# EAGLE board silense (EAGLE 9.5.1), part 1 of 4

Size 160 x 100 mm. Coordinates in mm from the lower left corner, seen from the top.
Outline: 0,0 160,0 160,100 0,100 0,0
Copper layers (1*16): Top 0.035mm / dielectric 0.15mm / Bottom 0.035mm
Design rules "default": minimum track width 6mil, minimum drill 0.35mm, track to track 6mil, track to pad 6mil, pad to pad 6mil, via to via 6mil, smd to smd 6mil, copper to edge 40mil, drill to drill 6mil, minimum pad ring 10mil, minimum via ring 8mil, stop-mask expansion 4mil, vias tented up to drill 0mil, thermal gap 10mil
Net classes: 1 power_cw: width 0.2 mm; 2 power: width 0.3 mm

## Footprints (pad centres in the part's own frame; a part is rotated, then mirrored left to right if it is on the bottom)
POWERDI-123 = smd 0.9 x 1.4: A -1.6,0 | smd 2.2 x 1.4: C 0.95,0
R141426 = drill 1.295: 1 0,0; 2 5.08,5.08; 3 -5.08,5.08; 4 -5.08,-5.08; 5 5.08,-5.08
FMC-LPC-MALE = smd 0.635 x 0.635 bottom: C1 -3.175,-24.765; C2 -3.175,-23.495; C3 -3.175,-22.225; C4 -3.175,-20.955; C5 -3.175,-19.685; C6 -3.175,-18.415; C7 -3.175,-17.145; C8 -3.175,-15.875; C9 -3.175,-14.605; C10 -3.175,-13.335; C11 -3.175,-12.065; C12 -3.175,-10.795; C13 -3.175,-9.525; C14 -3.175,-8.255; C15 -3.175,-6.985; C16 -3.175,-5.715; C17 -3.175,-4.445; C18 -3.175,-3.175; C19 -3.175,-1.905; C20 -3.175,-0.635; C21 -3.175,0.635; C22 -3.175,1.905; C23 -3.175,3.175; C24 -3.175,4.445; C25 -3.175,5.715; C26 -3.175,6.985; C27 -3.175,8.255; C28 -3.175,9.525; C29 -3.175,10.795; C30 -3.175,12.065; C31 -3.175,13.335; C32 -3.175,14.605; C33 -3.175,15.875; C34 -3.175,17.145; C35 -3.175,18.415; C36 -3.175,19.685; C37 -3.175,20.955; C38 -3.175,22.225; C39 -3.175,23.495; C40 -3.175,24.765; D1 -1.905,-24.765; D2 -1.905,-23.495; D3 -1.905,-22.225; D4 -1.905,-20.955; D5 -1.905,-19.685; D6 -1.905,-18.415; D7 -1.905,-17.145; D8 -1.905,-15.875; D9 -1.905,-14.605; D10 -1.905,-13.335; D11 -1.905,-12.065; D12 -1.905,-10.795; D13 -1.905,-9.525; D14 -1.905,-8.255; D15 -1.905,-6.985; D16 -1.905,-5.715; D17 -1.905,-4.445; D18 -1.905,-3.175; D19 -1.905,-1.905; D20 -1.905,-0.635; D21 -1.905,0.635; D22 -1.905,1.905; D23 -1.905,3.175; D24 -1.905,4.445; D25 -1.905,5.715; D26 -1.905,6.985; D27 -1.905,8.255; D28 -1.905,9.525; D29 -1.905,10.795; D30 -1.905,12.065; D31 -1.905,13.335; D32 -1.905,14.605; D33 -1.905,15.875; D34 -1.905,17.145; D35 -1.905,18.415; D36 -1.905,19.685; D37 -1.905,20.955; D38 -1.905,22.225; D39 -1.905,23.495; D40 -1.905,24.765; G1 1.905,-24.765; G2 1.905,-23.495; G3 1.905,-22.225; G4 1.905,-20.955; G5 1.905,-19.685; G6 1.905,-18.415; G7 1.905,-17.145; G8 1.905,-15.875; G9 1.905,-14.605; G10 1.905,-13.335; G11 1.905,-12.065; G12 1.905,-10.795; G13 1.905,-9.525; G14 1.905,-8.255; G15 1.905,-6.985; G16 1.905,-5.715; G17 1.905,-4.445; G18 1.905,-3.175; G19 1.905,-1.905; G20 1.905,-0.635; G21 1.905,0.635; G22 1.905,1.905; G23 1.905,3.175; G24 1.905,4.445; G25 1.905,5.715; G26 1.905,6.985; G27 1.905,8.255; G28 1.905,9.525; G29 1.905,10.795; G30 1.905,12.065; G31 1.905,13.335; G32 1.905,14.605; G33 1.905,15.875; G34 1.905,17.145; G35 1.905,18.415; G36 1.905,19.685; G37 1.905,20.955; G38 1.905,22.225; G39 1.905,23.495; G40 1.905,24.765; H1 3.175,-24.765; H2 3.175,-23.495; H3 3.175,-22.225; H4 3.175,-20.955; H5 3.175,-19.685; H6 3.175,-18.415; H7 3.175,-17.145; H8 3.175,-15.875; H9 3.175,-14.605; H10 3.175,-13.335; H11 3.175,-12.065; H12 3.175,-10.795; H13 3.175,-9.525; H14 3.175,-8.255; H15 3.175,-6.985; H16 3.175,-5.715; H17 3.175,-4.445; H18 3.175,-3.175; H19 3.175,-1.905; H20 3.175,-0.635; H21 3.175,0.635; H22 3.175,1.905; H23 3.175,3.175; H24 3.175,4.445; H25 3.175,5.715; H26 3.175,6.985; H27 3.175,8.255; H28 3.175,9.525; H29 3.175,10.795; H30 3.175,12.065; H31 3.175,13.335; H32 3.175,14.605; H33 3.175,15.875; H34 3.175,17.145; H35 3.175,18.415; H36 3.175,19.685; H37 3.175,20.955; H38 3.175,22.225; H39 3.175,23.495; H40 3.175,24.765 | drill 2.692 pad 4.445: M1 2.007,31.496; M2 2.007,-31.496 | hole 1.321: 0,-27.191; 3.048,27.191
3,17/1,3 = drill 1.321 pad 3.175 octagon: 1 0,0
43045-0809 = smd 1.27 x 2.92: P$1 4.5,5.47; P$2 1.5,5.47; P$3 -1.5,5.47; P$4 -4.5,5.47; P$5 4.5,10.1; P$6 1.5,10.1; P$7 -1.5,10.1; P$8 -4.5,10.1 | smd 3.43 x 1.65: TAB1 -8.38,0; TAB2 8.38,0
BTB_CONN_68_F = smd 1.1 x 0.8: 1 -2.75,20.955; 2 -2.75,19.685; 3 -2.75,18.415; 4 -2.75,17.145; 5 -2.75,15.875; 6 -2.75,14.605; 7 -2.75,13.335; 8 -2.75,12.065; 9 -2.75,10.795; 10 -2.75,9.525; 11 -2.75,8.255; 12 -2.75,6.985; 13 -2.75,5.715; 14 -2.75,4.445; 15 -2.75,3.175; 16 -2.75,1.905; 17 -2.75,0.635; 18 -2.75,-0.635; 19 -2.75,-1.905; 20 -2.75,-3.175; 21 -2.75,-4.445; 22 -2.75,-5.715; 23 -2.75,-6.985; 24 -2.75,-8.255; 25 -2.75,-9.525; 26 -2.75,-10.795; 27 -2.75,-12.065; 28 -2.75,-13.335; 29 -2.75,-14.605; 30 -2.75,-15.875; 31 -2.75,-17.145; 32 -2.75,-18.415; 33 -2.75,-19.685; 34 -2.75,-20.955; 35 2.75,20.955; 36 2.75,19.685; 37 2.75,18.415; 38 2.75,17.145; 39 2.75,15.875; 40 2.75,14.605; 41 2.75,13.335; 42 2.75,12.065; 43 2.75,10.795; 44 2.75,9.525; 45 2.75,8.255; 46 2.75,6.985; 47 2.75,5.715; 48 2.75,4.445; 49 2.75,3.175; 50 2.75,1.905; 51 2.75,0.635; 52 2.75,-0.635; 53 2.75,-1.905; 54 2.75,-3.175; 55 2.75,-4.445; 56 2.75,-5.715; 57 2.75,-6.985; 58 2.75,-8.255; 59 2.75,-9.525; 60 2.75,-10.795; 61 2.75,-12.065; 62 2.75,-13.335; 63 2.75,-14.605; 64 2.75,-15.875; 65 2.75,-17.145; 66 2.75,-18.415; 67 2.75,-19.685; 68 2.75,-20.955 | smd 2.5 x 1.2: P$1 -2.55,23.465; P$2 2.55,23.465; P$3 -2.55,-23.465; P$4 2.55,-23.465 | hole 1.6: 0,23.165; 0,-23.165
C0805 = smd 1.3 x 1.5: 1 -0.95,0; 2 0.95,0
TP380X203 = smd 3.8 x 2.03: 1 0,0
KEYSTONE_5015 = smd 3.43 x 1.78: 1 0,0
R0805 = smd 1.3 x 1.5: 1 -0.95,0; 2 0.95,0
TFLGA-56LD = smd 0.4 x 0.2: AGND 3.7,-1.575; CK 3.7,2.925; CW 3.7,2.475; DGND 3.7,1.575; DVDD 3.7,2.025; HVM@1 -3.7,1.125; HVM@2 -3.7,0.675; HVM@3 -3.7,0.225; HVM@4 -3.7,-0.225; HVM@5 -3.7,-0.675; HVM_CW -3.7,-1.125; HVP@1 3.7,0.675; HVP@2 3.7,0.225; HVP@3 3.7,-0.225; HVP@4 3.7,-0.675; HVP@5 3.7,-1.125; HVP_CW 3.7,1.125; THSD 3.7,-2.925; VDDM 3.7,-2.025; VDDP 3.7,-2.475; XDCR_1 -3.7,2.925; XDCR_2 -3.7,2.475; XDCR_3 -3.7,2.025; XDCR_4 -3.7,1.575; XDCR_5 -3.7,-1.575; XDCR_6 -3.7,-2.025; XDCR_7 -3.7,-2.475; XDCR_8 -3.7,-2.925 | smd 0.2 x 0.4: GND_PWR@1 -2.925,-3.7; GND_PWR@2 -0.675,-3.7; GND_PWR@3 -0.675,3.7; GND_PWR@4 -2.925,3.7; IN1_0 2.925,3.7; IN1_1 2.475,3.7; IN2_0 2.025,3.7; IN2_1 1.575,3.7; IN3_0 1.125,3.7; IN3_1 0.675,3.7; IN4_0 0.225,3.7; IN4_1 -0.225,3.7; IN5_0 -0.225,-3.7; IN5_1 0.225,-3.7; IN6_0 0.675,-3.7; IN6_1 1.125,-3.7; IN7_0 1.575,-3.7; IN7_1 2.025,-3.7; IN8_0 2.475,-3.7; IN8_1 2.925,-3.7; LVOUT_1 -1.125,3.7; LVOUT_2 -1.575,3.7; LVOUT_3 -2.025,3.7; LVOUT_4 -2.475,3.7; LVOUT_5 -2.475,-3.7; LVOUT_6 -2.025,-3.7; LVOUT_7 -1.575,-3.7; LVOUT_8 -1.125,-3.7 | smd 3.5 x 3.5: SUB 0,0
CAPC3216X180N = smd 1.15 x 1.8: 1 -1.5,0; 2 1.5,0
CAPC6050X550N = smd 2.39 x 5.51: 1 -2.26,0; 2 2.26,0
CAPC3416X90N = smd 1.13 x 1.78: 1 -1.44,0; 2 1.44,0
C1206 = smd 1.6 x 1.8: 1 -1.4,0; 2 1.4,0
DIOM7958X256N = smd 2 x 3.05: 1 -3.6,0; 2 3.6,0
DIOM7959X262N = smd 2.2 x 3.15: 1 -3.5,0; 2 3.5,0
SOP65P640X120-21N = smd 1.45 x 0.45: 1 -2.925,2.925; 2 -2.925,2.275; 3 -2.925,1.625; 4 -2.925,0.975; 5 -2.925,0.325; 6 -2.925,-0.325; 7 -2.925,-0.975; 8 -2.925,-1.625; 9 -2.925,-2.275; 10 -2.925,-2.925; 11 2.925,-2.925; 12 2.925,-2.275; 13 2.925,-1.625; 14 2.925,-0.975; 15 2.925,-0.325; 16 2.925,0.325; 17 2.925,0.975; 18 2.925,1.625; 19 2.925,2.275; 20 2.925,2.925 | smd 2.74 x 3.86: 21 0,0
WE-TPC_282892 = smd 3.2 x 1: 1 0,1.1; 2 0,-1.1
WE-LHMI_402048 = smd 1.5 x 2.4: 1 -1.85,0; 2 1.85,0
M1206 = smd 1.6 x 2: 1 -1.4,0; 2 1.4,0
R1206 = smd 1.6 x 1.803: 1 -1.422,0; 2 1.422,0
QFN32 = smd 0.6 x 0.3: 1 -2.3,1.75; 2 -2.3,1.25; 3 -2.3,0.75; 4 -2.3,0.25; 5 -2.3,-0.25; 6 -2.3,-0.75; 7 -2.3,-1.25; 8 -2.3,-1.75; 17 2.3,-1.75; 18 2.3,-1.25; 19 2.3,-0.75; 20 2.3,-0.25; 21 2.3,0.25; 22 2.3,0.75; 23 2.3,1.25; 24 2.3,1.75 | smd 0.3 x 0.6: 9 -1.75,-2.3; 10 -1.25,-2.3; 11 -0.75,-2.3; 12 -0.25,-2.3; 13 0.25,-2.3; 14 0.75,-2.3; 15 1.25,-2.3; 16 1.75,-2.3; 25 1.75,2.3; 26 1.25,2.3; 27 0.75,2.3; 28 0.25,2.3; 29 -0.25,2.3; 30 -0.75,2.3; 31 -1.25,2.3; 32 -1.75,2.3 | smd 3.2 x 3.2: EXP 0,0
C0402 = smd 0.7 x 0.9: 1 -0.65,0; 2 0.65,0
C1210 = smd 1.6 x 2.7: 1 -1.4,0; 2 1.4,0
R0402 = smd 0.6 x 0.7: 1 -0.5,0; 2 0.5,0
WCAP-CSGP_0402 = smd 0.5 x 0.5: 1 -0.5,0; 2 0.5,0
SOT95P260X110-3N = smd 1.3 x 0.6: 1 -1.1,0.95; 2 -1.1,-0.95; 3 1.1,0
QFN50P900X900X100-65N = smd 0.85 x 0.3: 1 -4.45,3.75; 2 -4.45,3.25; 3 -4.45,2.75; 4 -4.45,2.25; 5 -4.45,1.75; 6 -4.45,1.25; 7 -4.45,0.75; 8 -4.45,0.25; 9 -4.45,-0.25; 10 -4.45,-0.75; 11 -4.45,-1.25; 12 -4.45,-1.75; 13 -4.45,-2.25; 14 -4.45,-2.75; 15 -4.45,-3.25; 16 -4.45,-3.75; 33 4.45,-3.75; 34 4.45,-3.25; 35 4.45,-2.75; 36 4.45,-2.25; 37 4.45,-1.75; 38 4.45,-1.25; 39 4.45,-0.75; 40 4.45,-0.25; 41 4.45,0.25; 42 4.45,0.75; 43 4.45,1.25; 44 4.45,1.75; 45 4.45,2.25; 46 4.45,2.75; 47 4.45,3.25; 48 4.45,3.75 | smd 0.3 x 0.85: 17 -3.75,-4.45; 18 -3.25,-4.45; 19 -2.75,-4.45; 20 -2.25,-4.45; 21 -1.75,-4.45; 22 -1.25,-4.45; 23 -0.75,-4.45; 24 -0.25,-4.45; 25 0.25,-4.45; 26 0.75,-4.45; 27 1.25,-4.45; 28 1.75,-4.45; 29 2.25,-4.45; 30 2.75,-4.45; 31 3.25,-4.45; 32 3.75,-4.45; 49 3.75,4.45; 50 3.25,4.45; 51 2.75,4.45; 52 2.25,4.45; 53 1.75,4.45; 54 1.25,4.45; 55 0.75,4.45; 56 0.25,4.45; 57 -0.25,4.45; 58 -0.75,4.45; 59 -1.25,4.45; 60 -1.75,4.45; 61 -2.25,4.45; 62 -2.75,4.45; 63 -3.25,4.45; 64 -3.75,4.45 | smd 4.85 x 4.85: 65 0,0
L2012C = smd 1 x 1: 1 -1,0; 2 1,0
R0402' = smd 0.7 x 0.9: 1 -0.65,0; 2 0.65,0
TRIMPOT-SMD-TC33X = smd 1.2 x 1.2: 1 -1,-1.825; 3 1,-1.825 | smd 1.5 x 1.6: 2 0,1.5
C0603 = smd 1.1 x 1: 1 -0.85,0; 2 0.85,0
SOD3816X128N = smd 1.2 x 0.8: 1 -1.7,0; 2 1.7,0
SOP64P601X175-16N = smd 1.526 x 0.435: 1 -2.712,2.222; 2 -2.712,1.588; 3 -2.712,0.952; 4 -2.712,0.318; 5 -2.712,-0.318; 6 -2.712,-0.952; 7 -2.712,-1.588; 8 -2.712,-2.222; 9 2.712,-2.222; 10 2.712,-1.588; 11 2.712,-0.952; 12 2.712,-0.318; 13 2.712,0.318; 14 2.712,0.952; 15 2.712,1.588; 16 2.712,2.222
M0805 = smd 1.3 x 1.6: 1 -0.95,0; 2 0.95,0

## Placement (x,y rotation side)
CONN_FPGA1:D3  SBR1U200P1  [POWERDI-123]  not placed on the board
CONN_FPGA1:D4  SBR1U200P1  [POWERDI-123]  not placed on the board
CONN_FPGA1:D13  SBR1U200P1  [POWERDI-123]  not placed on the board
CONN_FPGA1:D14  SBR1U200P1  [POWERDI-123]  not placed on the board
CONN_FPGA1:D15  SBR3U20SA  [POWERDI-123]  not placed on the board
CONN_FPGA1:D16  SBR3U20SA  [POWERDI-123]  not placed on the board
CONN_FPGA1:D17  SBR1U200P1  [POWERDI-123]  not placed on the board
CONN_FPGA1:D18  SBR1U200P1  [POWERDI-123]  not placed on the board
CONN_FPGA1:D19  SBR1U200P1  [POWERDI-123]  not placed on the board
CONN_FPGA1:D20  SBR1U200P1  [POWERDI-123]  not placed on the board
CONN_FPGA1:D21  SBR3U20SA  [POWERDI-123]  not placed on the board
CONN_FPGA1:D22  SBR3U20SA  [POWERDI-123]  not placed on the board
CONN_FPGA1:HVM$1  R141426  [R141426]  not placed on the board
CONN_FPGA1:HVM_CW$1  R141426  [R141426]  not placed on the board
CONN_FPGA1:HVP$1  R141426  [R141426]  not placed on the board
CONN_FPGA1:HVP_CW$1  R141426  [R141426]  not placed on the board
CONN_FPGA1:J1  FMC-LPC  [FMC-LPC-MALE]  not placed on the board
CONN_FPGA1:PGND+  GND  [3,17/1,3]  not placed on the board
CONN_FPGA1:PGND-  [3,17/1,3]  not placed on the board
CONN_FPGA1:PGNDD  [3,17/1,3]  not placed on the board
CONN_FPGA1:PHVM  [3,17/1,3]  not placed on the board
CONN_FPGA1:PHVM_CW  [3,17/1,3]  not placed on the board
CONN_FPGA1:PHVP  [3,17/1,3]  not placed on the board
CONN_FPGA1:PHVP_CW  [3,17/1,3]  not placed on the board
CONN_FPGA1:POWER_BOARD_CONN  43045-0809  [43045-0809]  not placed on the board
CONN_FPGA1:PVDDM  [3,17/1,3]  not placed on the board
CONN_FPGA1:PVDDP  [3,17/1,3]  not placed on the board
CONN_FPGA1:VDDM$1  R141426  [R141426]  not placed on the board
CONN_FPGA1:VDDP$1  R141426  [R141426]  not placed on the board
CONN_RESONATORS1:C30  CBEC219-3479B001C1AF  [BTB_CONN_68_F]  not placed on the board
DRIVER1:C170  220n 100V  [C0805]  not placed on the board
DRIVER1:C172  220n 100V  [C0805]  not placed on the board
DRIVER1:C174  220n 100V  [C0805]  not placed on the board
DRIVER1:C175  220n 100V  [C0805]  not placed on the board
DRIVER1:C177  220n 100V  [C0805]  not placed on the board
DRIVER1:C178  220n 100V  [C0805]  not placed on the board
DRIVER1:C180  220n 100V  [C0805]  not placed on the board
DRIVER1:C181  220n 100V  [C0805]  not placed on the board
DRIVER1:C182  220n 100V  [C0805]  not placed on the board
DRIVER1:C183  220n 100V  [C0805]  not placed on the board
DRIVER1:C184  220n 100V  [C0805]  not placed on the board
DRIVER1:C185  220n 100V  [C0805]  not placed on the board
DRIVER1:C190  220n 100V  [C0805]  not placed on the board
DRIVER1:C191  220n 100V  [C0805]  not placed on the board
DRIVER1:D0_0  [POWERDI-123]  not placed on the board
DRIVER1:D0_1  [POWERDI-123]  not placed on the board
DRIVER1:D1_0  [POWERDI-123]  not placed on the board
DRIVER1:D1_1  [POWERDI-123]  not placed on the board
DRIVER1:D2_0  [POWERDI-123]  not placed on the board
DRIVER1:D2_1  [POWERDI-123]  not placed on the board
DRIVER1:D3_0  [POWERDI-123]  not placed on the board
DRIVER1:D3_1  [POWERDI-123]  not placed on the board
DRIVER1:D4_0  [POWERDI-123]  not placed on the board
DRIVER1:D4_1  [POWERDI-123]  not placed on the board
DRIVER1:D5_0  [POWERDI-123]  not placed on the board
DRIVER1:D5_1  [POWERDI-123]  not placed on the board
DRIVER1:D6_0  [POWERDI-123]  not placed on the board
DRIVER1:D6_1  [POWERDI-123]  not placed on the board
DRIVER1:D7_0  [POWERDI-123]  not placed on the board
DRIVER1:D7_1  [POWERDI-123]  not placed on the board
DRIVER1:GND_1  5019  [TP380X203]  not placed on the board
DRIVER1:IN0_0  5015  [KEYSTONE_5015]  not placed on the board
DRIVER1:IN0_1  5015  [KEYSTONE_5015]  not placed on the board
DRIVER1:LVOUT0  5015  [KEYSTONE_5015]  not placed on the board
DRIVER1:R2  10k  [R0805]  not placed on the board
DRIVER1:STHV_0  STHV800  [TFLGA-56LD]  not placed on the board
DRIVER1:T_OUT_0  5015  [KEYSTONE_5015]  not placed on the board
DRIVER1:T_OUT_1  5015  [KEYSTONE_5015]  not placed on the board
DRIVER1:T_OUT_2  5015  [KEYSTONE_5015]  not placed on the board
DRIVER1:T_OUT_3  5015  [KEYSTONE_5015]  not placed on the board
DRIVER1:T_OUT_4  5015  [KEYSTONE_5015]  not placed on the board
DRIVER1:T_OUT_5  5015  [KEYSTONE_5015]  not placed on the board
DRIVER1:T_OUT_6  5015  [KEYSTONE_5015]  not placed on the board
DRIVER1:T_OUT_7  5015  [KEYSTONE_5015]  not placed on the board
DRIVER2:C170  220n 100V  [C0805]  not placed on the board
DRIVER2:C172  220n 100V  [C0805]  not placed on the board
DRIVER2:C174  220n 100V  [C0805]  not placed on the board
DRIVER2:C175  220n 100V  [C0805]  not placed on the board
DRIVER2:C177  220n 100V  [C0805]  not placed on the board
DRIVER2:C178  220n 100V  [C0805]  not placed on the board
DRIVER2:C180  220n 100V  [C0805]  not placed on the board
DRIVER2:C181  220n 100V  [C0805]  not placed on the board
DRIVER2:C182  220n 100V  [C0805]  not placed on the board
DRIVER2:C183  220n 100V  [C0805]  not placed on the board
DRIVER2:C184  220n 100V  [C0805]  not placed on the board
DRIVER2:C185  220n 100V  [C0805]  not placed on the board
DRIVER2:C190  220n 100V  [C0805]  not placed on the board
DRIVER2:C191  220n 100V  [C0805]  not placed on the board
DRIVER2:D0_0  [POWERDI-123]  not placed on the board
DRIVER2:D0_1  [POWERDI-123]  not placed on the board
DRIVER2:D1_0  [POWERDI-123]  not placed on the board
DRIVER2:D1_1  [POWERDI-123]  not placed on the board
DRIVER2:D2_0  [POWERDI-123]  not placed on the board
DRIVER2:D2_1  [POWERDI-123]  not placed on the board
DRIVER2:D3_0  [POWERDI-123]  not placed on the board
DRIVER2:D3_1  [POWERDI-123]  not placed on the board
DRIVER2:D4_0  [POWERDI-123]  not placed on the board
DRIVER2:D4_1  [POWERDI-123]  not placed on the board
DRIVER2:D5_0  [POWERDI-123]  not placed on the board
DRIVER2:D5_1  [POWERDI-123]  not placed on the board
DRIVER2:D6_0  [POWERDI-123]  not placed on the board
DRIVER2:D6_1  [POWERDI-123]  not placed on the board
DRIVER2:D7_0  [POWERDI-123]  not placed on the board
DRIVER2:D7_1  [POWERDI-123]  not placed on the board
DRIVER2:GND_1  5019  [TP380X203]  not placed on the board
DRIVER2:IN0_0  5015  [KEYSTONE_5015]  not placed on the board
DRIVER2:IN0_1  5015  [KEYSTONE_5015]  not placed on the board
DRIVER2:LVOUT0  5015  [KEYSTONE_5015]  not placed on the board
DRIVER2:R2  10k  [R0805]  not placed on the board
DRIVER2:STHV_0  STHV800  [TFLGA-56LD]  not placed on the board
DRIVER2:T_OUT_0  5015  [KEYSTONE_5015]  not placed on the board
DRIVER2:T_OUT_1  5015  [KEYSTONE_5015]  not placed on the board
DRIVER2:T_OUT_2  5015  [KEYSTONE_5015]  not placed on the board
DRIVER2:T_OUT_3  5015  [KEYSTONE_5015]  not placed on the board
DRIVER2:T_OUT_4  5015  [KEYSTONE_5015]  not placed on the board
DRIVER2:T_OUT_5  5015  [KEYSTONE_5015]  not placed on the board
DRIVER2:T_OUT_6  5015  [KEYSTONE_5015]  not placed on the board
DRIVER2:T_OUT_7  5015  [KEYSTONE_5015]  not placed on the board
POWER1:C39  C3216X7R1H225K160AE  [CAPC3216X180N]  not placed on the board
POWER1:C40  1206 x7r 47uF 25V  [CAPC6050X550N]  not placed on the board
POWER1:C41  0.1uF x7r 1206  [CAPC3416X90N]  not placed on the board
POWER1:C42  0.1uF x7r 1206  [CAPC3416X90N]  not placed on the board
POWER1:C43  1206 x7r 47uF 25V  [CAPC6050X550N]  not placed on the board
POWER1:C44  1206 x7r 47uF 25V  [CAPC6050X550N]  not placed on the board
POWER1:C45  1206 x7r 2.2uF 25V  [C1206]  not placed on the board
POWER1:C46  1206 x7r 2.2uF 25V  [C1206]  not placed on the board
POWER1:C47  1206 x7r 47uF 25V  [CAPC6050X550N]  not placed on the board
POWER1:D25  MBRS360T3G  [DIOM7958X256N]  not placed on the board
POWER1:D26  VS-MBRS340-M3_9AT  [DIOM7959X262N]  not placed on the board
POWER1:IC3  LT8471EFE#PBF  [SOP65P640X120-21N]  not placed on the board
POWER1:L2  744025150  [WE-TPC_282892]  not placed on the board
POWER1:L7  74437324068  [WE-LHMI_402048]  not placed on the board
POWER1:L8  74437324100  [WE-LHMI_402048]  not placed on the board
POWER1:R17  261k 25V  [M1206]  not placed on the board
POWER1:R18  82k 25V  [M1206]  not placed on the board
POWER1:R19  316k  [R1206]  not placed on the board
POWER1:R20  59k  [R1206]  not placed on the board
POWER1:R21  316k  [R1206]  not placed on the board
POWER1:R22  59k  [R1206]  not placed on the board
POWER1:R23  100k  [R1206]  not placed on the board
POWER1:R24  100k  [R1206]  not placed on the board
POWER1:R25  187k  [R1206]  not placed on the board
RECEIVER1:ADC2:ADC1  LTC2344-16  [QFN32]  not placed on the board
RECEIVER1:ADC2:C139  0.1uf  [C0402]  not placed on the board
RECEIVER1:ADC2:C140  47uf 10V  [C1210]  not placed on the board
RECEIVER1:ADC2:C141  2.2uf  [C0402]  not placed on the board
RECEIVER1:ADC2:C142  0.1uf  [C0402]  not placed on the board
RECEIVER1:ADC2:C143  0.1uf  [C0402]  not placed on the board
RECEIVER1:ADC2:R1  33R  [R0402]  not placed on the board
RECEIVER1:ADC2:R2  33R  [R0402]  not placed on the board
RECEIVER1:ADC2:R3  33R  [R0402]  not placed on the board
RECEIVER1:ADC2:R4  33R  [R0402]  not placed on the board
RECEIVER1:ADC2:R5  33R  [R0402]  not placed on the board
RECEIVER1:ADC2:R6  33R  [R0402]  not placed on the board
RECEIVER1:ADC2:R7  33R  [R0402]  not placed on the board
RECEIVER1:S1:C1  0.1uF  [WCAP-CSGP_0402]  not placed on the board
RECEIVER1:S1:C2  0.1uF  [WCAP-CSGP_0402]  not placed on the board
RECEIVER1:S1:C3  0.1uF  [WCAP-CSGP_0402]  not placed on the board
RECEIVER1:S1:C4  0.1uF  [WCAP-CSGP_0402]  not placed on the board
RECEIVER1:S1:C5  0.1uF  [WCAP-CSGP_0402]  not placed on the board
RECEIVER1:S1:C6  0.1uF  [WCAP-CSGP_0402]  not placed on the board
RECEIVER1:S1:C7  0.1uF  [WCAP-CSGP_0402]  not placed on the board
RECEIVER1:S1:C8  0.1uF  [WCAP-CSGP_0402]  not placed on the board
RECEIVER1:S1:C9  0.1uF  [WCAP-CSGP_0402]  not placed on the board
RECEIVER1:S1:C10  0.1uF  [WCAP-CSGP_0402]  not placed on the board
RECEIVER1:S1:C11  18nF  [WCAP-CSGP_0402]  not placed on the board
RECEIVER1:S1:C12  18nF  [WCAP-CSGP_0402]  not placed on the board
RECEIVER1:S1:C13  0.1uF  [WCAP-CSGP_0402]  not placed on the board
RECEIVER1:S1:C14  0.1uF  [WCAP-CSGP_0402]  not placed on the board
RECEIVER1:S1:C15  0.1uF  [WCAP-CSGP_0402]  not placed on the board
RECEIVER1:S1:C16  0.1uF  [WCAP-CSGP_0402]  not placed on the board
RECEIVER1:S1:C17  0.1uF  [WCAP-CSGP_0402]  not placed on the board
RECEIVER1:S1:C18  0.1uF  [WCAP-CSGP_0402]  not placed on the board
RECEIVER1:S1:C19  10nF  [WCAP-CSGP_0402]  not placed on the board
RECEIVER1:S1:C20  10nF  [WCAP-CSGP_0402]  not placed on the board
RECEIVER1:S1:C21  0.1uF  [WCAP-CSGP_0402]  not placed on the board
RECEIVER1:S1:C22  0.1uF  [WCAP-CSGP_0402]  not placed on the board
RECEIVER1:S1:C23  0.1uF  [WCAP-CSGP_0402]  not placed on the board
RECEIVER1:S1:C24  22pF  [WCAP-CSGP_0402]  not placed on the board
RECEIVER1:S1:C26  0.1uF  [WCAP-CSGP_0402]  not placed on the board
RECEIVER1:S1:C27  22pF  [WCAP-CSGP_0402]  not placed on the board
RECEIVER1:S1:C51  0.1uF  [WCAP-CSGP_0402]  not placed on the board
RECEIVER1:S1:C52  0.1uF  [WCAP-CSGP_0402]  not placed on the board
RECEIVER1:S1:C53  0.1uF  [WCAP-CSGP_0402]  not placed on the board
RECEIVER1:S1:C54  0.1uF  [WCAP-CSGP_0402]  not placed on the board
RECEIVER1:S1:C55  0.1uF  [WCAP-CSGP_0402]  not placed on the board
RECEIVER1:S1:C56  0.1uF  [WCAP-CSGP_0402]  not placed on the board
RECEIVER1:S1:D1  BAT64-04E6433  [SOT95P260X110-3N]  not placed on the board
RECEIVER1:S1:D2  BAT64-04E6433  [SOT95P260X110-3N]  not placed on the board
RECEIVER1:S1:IC1  AD8334ACPZ  [QFN50P900X900X100-65N]  not placed on the board
RECEIVER1:S1:L1  BLM21AG121SN1D  [L2012C]  not placed on the board
RECEIVER1:S1:L6  BLM21AG121SN1D  [L2012C]  not placed on the board
RECEIVER1:S1:L27  BLM21AG121SN1D  [L2012C]  not placed on the board
RECEIVER1:S1:L28  BLM21AG121SN1D  [L2012C]  not placed on the board
RECEIVER1:S1:L29  BLM21AG121SN1D  [L2012C]  not placed on the board
RECEIVER1:S1:L30  BLM21AG121SN1D  [L2012C]  not placed on the board
RECEIVER1:S1:L31  BLM21AG121SN1D  [L2012C]  not placed on the board
RECEIVER1:S1:L32  BLM21AG121SN1D  [L2012C]  not placed on the board
RECEIVER1:S1:R1  39K  [R0402']  not placed on the board
RECEIVER1:S1:R2  0R  [R0402']  not placed on the board
RECEIVER1:S1:R3  39K  [R0402']  not placed on the board
RECEIVER1:S1:R4  4K02  [R0402']  not placed on the board
RECEIVER1:S1:R5  4K02  [R0402']  not placed on the board
RECEIVER1:S1:R6  DNP  [R0402']  not placed on the board
RECEIVER1:S1:R7  0R  [R0402']  not placed on the board
RECEIVER1:S1:R8  0R  [R0402']  not placed on the board
RECEIVER1:S1:R9  1K  [R0402']  not placed on the board
RECEIVER1:S1:R10  DNP  [R0402']  not placed on the board
RECEIVER1:S1:R11  0R  [R0402']  not placed on the board
RECEIVER1:S1:R12  274R  [R0402']  not placed on the board
RECEIVER1:S1:R13  1K  [R0402']  not placed on the board
RECEIVER1:S1:R15  274R  [R0402']  not placed on the board
RECEIVER1:S1:TP2_5  5019  [TP380X203]  not placed on the board
RECEIVER1:S1:TP2_6  5019  [TP380X203]  not placed on the board
RECEIVER1:S1:TP2_7  5019  [TP380X203]  not placed on the board
RECEIVER1:S1:TP2_8  5019  [TP380X203]  not placed on the board
RECEIVER1:S1:TP2_9  5019  [TP380X203]  not placed on the board
RECEIVER1:S1:TP2_10  5019  [TP380X203]  not placed on the board
RECEIVER1:S1:TP2_11  5019  [TP380X203]  not placed on the board
RECEIVER1:S1:TP2_12  5019  [TP380X203]  not placed on the board
RECEIVER1:S1:TP2_GND1  5019  [TP380X203]  not placed on the board
RECEIVER1:S1:VR1  10k  [TRIMPOT-SMD-TC33X]  not placed on the board
RECEIVER1:S1:VR2  10k  [TRIMPOT-SMD-TC33X]  not placed on the board
RECEIVER1:S2:C1  0.1uF  [WCAP-CSGP_0402]  not placed on the board
RECEIVER1:S2:C2  0.1uF  [WCAP-CSGP_0402]  not placed on the board
RECEIVER1:S2:C3  0.1uF  [WCAP-CSGP_0402]  not placed on the board
RECEIVER1:S2:C4  0.1uF  [WCAP-CSGP_0402]  not placed on the board
RECEIVER1:S2:C5  0.1uF  [WCAP-CSGP_0402]  not placed on the board
RECEIVER1:S2:C6  0.1uF  [WCAP-CSGP_0402]  not placed on the board
RECEIVER1:S2:C7  0.1uF  [WCAP-CSGP_0402]  not placed on the board
RECEIVER1:S2:C8  0.1uF  [WCAP-CSGP_0402]  not placed on the board
RECEIVER1:S2:C9  0.1uF  [WCAP-CSGP_0402]  not placed on the board
RECEIVER1:S2:C10  0.1uF  [WCAP-CSGP_0402]  not placed on the board
RECEIVER1:S2:C11  18nF  [WCAP-CSGP_0402]  not placed on the board
RECEIVER1:S2:C12  18nF  [WCAP-CSGP_0402]  not placed on the board
RECEIVER1:S2:C13  0.1uF  [WCAP-CSGP_0402]  not placed on the board
RECEIVER1:S2:C14  0.1uF  [WCAP-CSGP_0402]  not placed on the board
RECEIVER1:S2:C15  0.1uF  [WCAP-CSGP_0402]  not placed on the board
RECEIVER1:S2:C16  0.1uF  [WCAP-CSGP_0402]  not placed on the board
RECEIVER1:S2:C17  0.1uF  [WCAP-CSGP_0402]  not placed on the board
RECEIVER1:S2:C18  0.1uF  [WCAP-CSGP_0402]  not placed on the board
RECEIVER1:S2:C19  10nF  [WCAP-CSGP_0402]  not placed on the board
RECEIVER1:S2:C20  10nF  [WCAP-CSGP_0402]  not placed on the board
RECEIVER1:S2:C21  0.1uF  [WCAP-CSGP_0402]  not placed on the board
RECEIVER1:S2:C22  0.1uF  [WCAP-CSGP_0402]  not placed on the board
RECEIVER1:S2:C23  0.1uF  [WCAP-CSGP_0402]  not placed on the board
RECEIVER1:S2:C24  22pF  [WCAP-CSGP_0402]  not placed on the board
RECEIVER1:S2:C26  0.1uF  [WCAP-CSGP_0402]  not placed on the board
RECEIVER1:S2:C27  22pF  [WCAP-CSGP_0402]  not placed on the board
RECEIVER1:S2:C51  0.1uF  [WCAP-CSGP_0402]  not placed on the board
RECEIVER1:S2:C52  0.1uF  [WCAP-CSGP_0402]  not placed on the board
RECEIVER1:S2:C53  0.1uF  [WCAP-CSGP_0402]  not placed on the board
RECEIVER1:S2:C54  0.1uF  [WCAP-CSGP_0402]  not placed on the board
RECEIVER1:S2:C55  0.1uF  [WCAP-CSGP_0402]  not placed on the board
RECEIVER1:S2:C56  0.1uF  [WCAP-CSGP_0402]  not placed on the board
RECEIVER1:S2:D1  BAT64-04E6433  [SOT95P260X110-3N]  not placed on the board
RECEIVER1:S2:D2  BAT64-04E6433  [SOT95P260X110-3N]  not placed on the board
RECEIVER1:S2:IC1  AD8334ACPZ  [QFN50P900X900X100-65N]  not placed on the board
RECEIVER1:S2:L1  BLM21AG121SN1D  [L2012C]  not placed on the board
RECEIVER1:S2:L6  BLM21AG121SN1D  [L2012C]  not placed on the board
RECEIVER1:S2:L27  BLM21AG121SN1D  [L2012C]  not placed on the board
RECEIVER1:S2:L28  BLM21AG121SN1D  [L2012C]  not placed on the board
RECEIVER1:S2:L29  BLM21AG121SN1D  [L2012C]  not placed on the board
RECEIVER1:S2:L30  BLM21AG121SN1D  [L2012C]  not placed on the board
RECEIVER1:S2:L31  BLM21AG121SN1D  [L2012C]  not placed on the board
RECEIVER1:S2:L32  BLM21AG121SN1D  [L2012C]  not placed on the board
RECEIVER1:S2:R1  39K  [R0402']  not placed on the board
RECEIVER1:S2:R2  0R  [R0402']  not placed on the board
RECEIVER1:S2:R3  39K  [R0402']  not placed on the board
RECEIVER1:S2:R4  4K02  [R0402']  not placed on the board
RECEIVER1:S2:R5  4K02  [R0402']  not placed on the board
RECEIVER1:S2:R6  DNP  [R0402']  not placed on the board
RECEIVER1:S2:R7  0R  [R0402']  not placed on the board
RECEIVER1:S2:R8  0R  [R0402']  not placed on the board
RECEIVER1:S2:R9  1K  [R0402']  not placed on the board
RECEIVER1:S2:R10  DNP  [R0402']  not placed on the board
RECEIVER1:S2:R11  0R  [R0402']  not placed on the board
RECEIVER1:S2:R12  274R  [R0402']  not placed on the board
RECEIVER1:S2:R13  1K  [R0402']  not placed on the board
RECEIVER1:S2:R15  274R  [R0402']  not placed on the board
RECEIVER1:S2:TP2_5  5019  [TP380X203]  not placed on the board
RECEIVER1:S2:TP2_6  5019  [TP380X203]  not placed on the board
RECEIVER1:S2:TP2_7  5019  [TP380X203]  not placed on the board
RECEIVER1:S2:TP2_8  5019  [TP380X203]  not placed on the board
RECEIVER1:S2:TP2_9  5019  [TP380X203]  not placed on the board
RECEIVER1:S2:TP2_10  5019  [TP380X203]  not placed on the board
RECEIVER1:S2:TP2_11  5019  [TP380X203]  not placed on the board
RECEIVER1:S2:TP2_12  5019  [TP380X203]  not placed on the board
RECEIVER1:S2:TP2_GND1  5019  [TP380X203]  not placed on the board
RECEIVER1:S2:VR1  10k  [TRIMPOT-SMD-TC33X]  not placed on the board
RECEIVER1:S2:VR2  10k  [TRIMPOT-SMD-TC33X]  not placed on the board
RECEIVER1:S5:C1  100n  [C0603]  not placed on the board
RECEIVER1:S5:C2  100n  [C0603]  not placed on the board
RECEIVER1:S5:C3  100n C0G  [C1206]  not placed on the board
RECEIVER1:S5:C4  100n C0G  [C1206]  not placed on the board
RECEIVER1:S5:C5  3.3u  [C0402]  not placed on the board
RECEIVER1:S5:C6  3.3u  [C0402]  not placed on the board
RECEIVER1:S5:D1  MBR0520L  [SOD3816X128N]  not placed on the board
RECEIVER1:S5:D2  MBR0520L  [SOD3816X128N]  not placed on the board
RECEIVER1:S5:IC1  LT6238HGN#PBF  [SOP64P601X175-16N]  not placed on the board
RECEIVER1:S5:R1  300R  [M0805]  not placed on the board
RECEIVER1:S5:R2  300R  [M0805]  not placed on the board
RECEIVER1:S5:R3  82R  [M0805]  not placed on the board
RECEIVER1:S5:R4  82R  [M0805]  not placed on the board
RECEIVER1:S6:C1  100n  [C0603]  not placed on the board
RECEIVER1:S6:C2  100n  [C0603]  not placed on the board
RECEIVER1:S6:C3  100n C0G  [C1206]  not placed on the board
RECEIVER1:S6:C4  100n C0G  [C1206]  not placed on the board
RECEIVER1:S6:C5  3.3u  [C0402]  not placed on the board
RECEIVER1:S6:C6  3.3u  [C0402]  not placed on the board
RECEIVER1:S6:D1  MBR0520L  [SOD3816X128N]  not placed on the board
RECEIVER1:S6:D2  MBR0520L  [SOD3816X128N]  not placed on the board
RECEIVER1:S6:IC1  LT6238HGN#PBF  [SOP64P601X175-16N]  not placed on the board
RECEIVER1:S6:R1  300R  [M0805]  not placed on the board
RECEIVER1:S6:R2  300R  [M0805]  not placed on the board
RECEIVER1:S6:R3  82R  [M0805]  not placed on the board
RECEIVER1:S6:R4  82R  [M0805]  not placed on the board
RECEIVER1:S7:C1  100n  [C0603]  not placed on the board
RECEIVER1:S7:C2  100n  [C0603]  not placed on the board
RECEIVER1:S7:C3  100n C0G  [C1206]  not placed on the board
RECEIVER1:S7:C4  100n C0G  [C1206]  not placed on the board
RECEIVER1:S7:C5  3.3u  [C0402]  not placed on the board
RECEIVER1:S7:C6  3.3u  [C0402]  not placed on the board
RECEIVER1:S7:D1  MBR0520L  [SOD3816X128N]  not placed on the board
RECEIVER1:S7:D2  MBR0520L  [SOD3816X128N]  not placed on the board
RECEIVER1:S7:IC1  LT6238HGN#PBF  [SOP64P601X175-16N]  not placed on the board
RECEIVER1:S7:R1  300R  [M0805]  not placed on the board
RECEIVER1:S7:R2  300R  [M0805]  not placed on the board
RECEIVER1:S7:R3  82R  [M0805]  not placed on the board
RECEIVER1:S7:R4  82R  [M0805]  not placed on the board
RECEIVER1:S12:C1  100n  [C0603]  not placed on the board
RECEIVER1:S12:C2  100n  [C0603]  not placed on the board
RECEIVER1:S12:C3  100n C0G  [C1206]  not placed on the board
RECEIVER1:S12:C4  100n C0G  [C1206]  not placed on the board
RECEIVER1:S12:C5  3.3u  [C0402]  not placed on the board
RECEIVER1:S12:C6  3.3u  [C0402]  not placed on the board
RECEIVER1:S12:D1  MBR0520L  [SOD3816X128N]  not placed on the board
RECEIVER1:S12:D2  MBR0520L  [SOD3816X128N]  not placed on the board
RECEIVER1:S12:IC1  LT6238HGN#PBF  [SOP64P601X175-16N]  not placed on the board
RECEIVER1:S12:R1  300R  [M0805]  not placed on the board
RECEIVER1:S12:R2  300R  [M0805]  not placed on the board
RECEIVER1:S12:R3  82R  [M0805]  not placed on the board
RECEIVER1:S12:R4  82R  [M0805]  not placed on the board
RECEIVER2:ADC2:ADC1  LTC2344-16  [QFN32]  not placed on the board
RECEIVER2:ADC2:C139  0.1uf  [C0402]  not placed on the board
RECEIVER2:ADC2:C140  47uf 10V  [C1210]  not placed on the board
RECEIVER2:ADC2:C141  2.2uf  [C0402]  not placed on the board
RECEIVER2:ADC2:C142  0.1uf  [C0402]  not placed on the board
RECEIVER2:ADC2:C143  0.1uf  [C0402]  not placed on the board
RECEIVER2:ADC2:R1  33R  [R0402]  not placed on the board
RECEIVER2:ADC2:R2  33R  [R0402]  not placed on the board
RECEIVER2:ADC2:R3  33R  [R0402]  not placed on the board
RECEIVER2:ADC2:R4  33R  [R0402]  not placed on the board
RECEIVER2:ADC2:R5  33R  [R0402]  not placed on the board
RECEIVER2:ADC2:R6  33R  [R0402]  not placed on the board
RECEIVER2:ADC2:R7  33R  [R0402]  not placed on the board
RECEIVER2:S1:C1  0.1uF  [WCAP-CSGP_0402]  not placed on the board
RECEIVER2:S1:C2  0.1uF  [WCAP-CSGP_0402]  not placed on the board
RECEIVER2:S1:C3  0.1uF  [WCAP-CSGP_0402]  not placed on the board
RECEIVER2:S1:C4  0.1uF  [WCAP-CSGP_0402]  not placed on the board
RECEIVER2:S1:C5  0.1uF  [WCAP-CSGP_0402]  not placed on the board
RECEIVER2:S1:C6  0.1uF  [WCAP-CSGP_0402]  not placed on the board
RECEIVER2:S1:C7  0.1uF  [WCAP-CSGP_0402]  not placed on the board
RECEIVER2:S1:C8  0.1uF  [WCAP-CSGP_0402]  not placed on the board
RECEIVER2:S1:C9  0.1uF  [WCAP-CSGP_0402]  not placed on the board
RECEIVER2:S1:C10  0.1uF  [WCAP-CSGP_0402]  not placed on the board
RECEIVER2:S1:C11  18nF  [WCAP-CSGP_0402]  not placed on the board
RECEIVER2:S1:C12  18nF  [WCAP-CSGP_0402]  not placed on the board
RECEIVER2:S1:C13  0.1uF  [WCAP-CSGP_0402]  not placed on the board
RECEIVER2:S1:C14  0.1uF  [WCAP-CSGP_0402]  not placed on the board
RECEIVER2:S1:C15  0.1uF  [WCAP-CSGP_0402]  not placed on the board
RECEIVER2:S1:C16  0.1uF  [WCAP-CSGP_0402]  not placed on the board
RECEIVER2:S1:C17  0.1uF  [WCAP-CSGP_0402]  not placed on the board
RECEIVER2:S1:C18  0.1uF  [WCAP-CSGP_0402]  not placed on the board
RECEIVER2:S1:C19  10nF  [WCAP-CSGP_0402]  not placed on the board
RECEIVER2:S1:C20  10nF  [WCAP-CSGP_0402]  not placed on the board
RECEIVER2:S1:C21  0.1uF  [WCAP-CSGP_0402]  not placed on the board
RECEIVER2:S1:C22  0.1uF  [WCAP-CSGP_0402]  not placed on the board
RECEIVER2:S1:C23  0.1uF  [WCAP-CSGP_0402]  not placed on the board
RECEIVER2:S1:C24  22pF  [WCAP-CSGP_0402]  not placed on the board
RECEIVER2:S1:C26  0.1uF  [WCAP-CSGP_0402]  not placed on the board
RECEIVER2:S1:C27  22pF  [WCAP-CSGP_0402]  not placed on the board
RECEIVER2:S1:C51  0.1uF  [WCAP-CSGP_0402]  not placed on the board
RECEIVER2:S1:C52  0.1uF  [WCAP-CSGP_0402]  not placed on the board
RECEIVER2:S1:C53  0.1uF  [WCAP-CSGP_0402]  not placed on the board
RECEIVER2:S1:C54  0.1uF  [WCAP-CSGP_0402]  not placed on the board
RECEIVER2:S1:C55  0.1uF  [WCAP-CSGP_0402]  not placed on the board
RECEIVER2:S1:C56  0.1uF  [WCAP-CSGP_0402]  not placed on the board
RECEIVER2:S1:D1  BAT64-04E6433  [SOT95P260X110-3N]  not placed on the board
RECEIVER2:S1:D2  BAT64-04E6433  [SOT95P260X110-3N]  not placed on the board
RECEIVER2:S1:IC1  AD8334ACPZ  [QFN50P900X900X100-65N]  not placed on the board
RECEIVER2:S1:L1  BLM21AG121SN1D  [L2012C]  not placed on the board
RECEIVER2:S1:L6  BLM21AG121SN1D  [L2012C]  not placed on the board
RECEIVER2:S1:L27  BLM21AG121SN1D  [L2012C]  not placed on the board
RECEIVER2:S1:L28  BLM21AG121SN1D  [L2012C]  not placed on the board
RECEIVER2:S1:L29  BLM21AG121SN1D  [L2012C]  not placed on the board
RECEIVER2:S1:L30  BLM21AG121SN1D  [L2012C]  not placed on the board
RECEIVER2:S1:L31  BLM21AG121SN1D  [L2012C]  not placed on the board
RECEIVER2:S1:L32  BLM21AG121SN1D  [L2012C]  not placed on the board
RECEIVER2:S1:R1  39K  [R0402']  not placed on the board
RECEIVER2:S1:R2  0R  [R0402']  not placed on the board
RECEIVER2:S1:R3  39K  [R0402']  not placed on the board
RECEIVER2:S1:R4  4K02  [R0402']  not placed on the board
RECEIVER2:S1:R5  4K02  [R0402']  not placed on the board
RECEIVER2:S1:R6  DNP  [R0402']  not placed on the board
RECEIVER2:S1:R7  0R  [R0402']  not placed on the board
RECEIVER2:S1:R8  0R  [R0402']  not placed on the board
RECEIVER2:S1:R9  1K  [R0402']  not placed on the board
RECEIVER2:S1:R10  DNP  [R0402']  not placed on the board
RECEIVER2:S1:R11  0R  [R0402']  not placed on the board
RECEIVER2:S1:R12  274R  [R0402']  not placed on the board
RECEIVER2:S1:R13  1K  [R0402']  not placed on the board
RECEIVER2:S1:R15  274R  [R0402']  not placed on the board
RECEIVER2:S1:TP2_5  5019  [TP380X203]  not placed on the board
RECEIVER2:S1:TP2_6  5019  [TP380X203]  not placed on the board
RECEIVER2:S1:TP2_7  5019  [TP380X203]  not placed on the board
RECEIVER2:S1:TP2_8  5019  [TP380X203]  not placed on the board
RECEIVER2:S1:TP2_9  5019  [TP380X203]  not placed on the board
RECEIVER2:S1:TP2_10  5019  [TP380X203]  not placed on the board
RECEIVER2:S1:TP2_11  5019  [TP380X203]  not placed on the board
RECEIVER2:S1:TP2_12  5019  [TP380X203]  not placed on the board
RECEIVER2:S1:TP2_GND1  5019  [TP380X203]  not placed on the board
RECEIVER2:S1:VR1  10k  [TRIMPOT-SMD-TC33X]  not placed on the board
RECEIVER2:S1:VR2  10k  [TRIMPOT-SMD-TC33X]  not placed on the board
RECEIVER2:S2:C1  0.1uF  [WCAP-CSGP_0402]  not placed on the board
RECEIVER2:S2:C2  0.1uF  [WCAP-CSGP_0402]  not placed on the board
RECEIVER2:S2:C3  0.1uF  [WCAP-CSGP_0402]  not placed on the board
RECEIVER2:S2:C4  0.1uF  [WCAP-CSGP_0402]  not placed on the board
RECEIVER2:S2:C5  0.1uF  [WCAP-CSGP_0402]  not placed on the board
RECEIVER2:S2:C6  0.1uF  [WCAP-CSGP_0402]  not placed on the board
RECEIVER2:S2:C7  0.1uF  [WCAP-CSGP_0402]  not placed on the board
RECEIVER2:S2:C8  0.1uF  [WCAP-CSGP_0402]  not placed on the board
RECEIVER2:S2:C9  0.1uF  [WCAP-CSGP_0402]  not placed on the board
RECEIVER2:S2:C10  0.1uF  [WCAP-CSGP_0402]  not placed on the board
RECEIVER2:S2:C11  18nF  [WCAP-CSGP_0402]  not placed on the board
RECEIVER2:S2:C12  18nF  [WCAP-CSGP_0402]  not placed on the board
RECEIVER2:S2:C13  0.1uF  [WCAP-CSGP_0402]  not placed on the board
RECEIVER2:S2:C14  0.1uF  [WCAP-CSGP_0402]  not placed on the board
RECEIVER2:S2:C15  0.1uF  [WCAP-CSGP_0402]  not placed on the board
RECEIVER2:S2:C16  0.1uF  [WCAP-CSGP_0402]  not placed on the board
RECEIVER2:S2:C17  0.1uF  [WCAP-CSGP_0402]  not placed on the board
RECEIVER2:S2:C18  0.1uF  [WCAP-CSGP_0402]  not placed on the board
RECEIVER2:S2:C19  10nF  [WCAP-CSGP_0402]  not placed on the board
RECEIVER2:S2:C20  10nF  [WCAP-CSGP_0402]  not placed on the board
RECEIVER2:S2:C21  0.1uF  [WCAP-CSGP_0402]  not placed on the board
RECEIVER2:S2:C22  0.1uF  [WCAP-CSGP_0402]  not placed on the board
RECEIVER2:S2:C23  0.1uF  [WCAP-CSGP_0402]  not placed on the board
RECEIVER2:S2:C24  22pF  [WCAP-CSGP_0402]  not placed on the board
RECEIVER2:S2:C26  0.1uF  [WCAP-CSGP_0402]  not placed on the board
RECEIVER2:S2:C27  22pF  [WCAP-CSGP_0402]  not placed on the board
RECEIVER2:S2:C51  0.1uF  [WCAP-CSGP_0402]  not placed on the board
RECEIVER2:S2:C52  0.1uF  [WCAP-CSGP_0402]  not placed on the board
RECEIVER2:S2:C53  0.1uF  [WCAP-CSGP_0402]  not placed on the board
RECEIVER2:S2:C54  0.1uF  [WCAP-CSGP_0402]  not placed on the board
RECEIVER2:S2:C55  0.1uF  [WCAP-CSGP_0402]  not placed on the board
RECEIVER2:S2:C56  0.1uF  [WCAP-CSGP_0402]  not placed on the board
RECEIVER2:S2:D1  BAT64-04E6433  [SOT95P260X110-3N]  not placed on the board
RECEIVER2:S2:D2  BAT64-04E6433  [SOT95P260X110-3N]  not placed on the board
RECEIVER2:S2:IC1  AD8334ACPZ  [QFN50P900X900X100-65N]  not placed on the board
RECEIVER2:S2:L1  BLM21AG121SN1D  [L2012C]  not placed on the board
RECEIVER2:S2:L6  BLM21AG121SN1D  [L2012C]  not placed on the board
RECEIVER2:S2:L27  BLM21AG121SN1D  [L2012C]  not placed on the board
RECEIVER2:S2:L28  BLM21AG121SN1D  [L2012C]  not placed on the board
RECEIVER2:S2:L29  BLM21AG121SN1D  [L2012C]  not placed on the board
RECEIVER2:S2:L30  BLM21AG121SN1D  [L2012C]  not placed on the board
RECEIVER2:S2:L31  BLM21AG121SN1D  [L2012C]  not placed on the board
RECEIVER2:S2:L32  BLM21AG121SN1D  [L2012C]  not placed on the board
RECEIVER2:S2:R1  39K  [R0402']  not placed on the board
RECEIVER2:S2:R2  0R  [R0402']  not placed on the board
RECEIVER2:S2:R3  39K  [R0402']  not placed on the board
RECEIVER2:S2:R4  4K02  [R0402']  not placed on the board
RECEIVER2:S2:R5  4K02  [R0402']  not placed on the board
RECEIVER2:S2:R6  DNP  [R0402']  not placed on the board
RECEIVER2:S2:R7  0R  [R0402']  not placed on the board
RECEIVER2:S2:R8  0R  [R0402']  not placed on the board
RECEIVER2:S2:R9  1K  [R0402']  not placed on the board
RECEIVER2:S2:R10  DNP  [R0402']  not placed on the board
RECEIVER2:S2:R11  0R  [R0402']  not placed on the board
RECEIVER2:S2:R12  274R  [R0402']  not placed on the board
RECEIVER2:S2:R13  1K  [R0402']  not placed on the board
RECEIVER2:S2:R15  274R  [R0402']  not placed on the board
RECEIVER2:S2:TP2_5  5019  [TP380X203]  not placed on the board
RECEIVER2:S2:TP2_6  5019  [TP380X203]  not placed on the board
RECEIVER2:S2:TP2_7  5019  [TP380X203]  not placed on the board
RECEIVER2:S2:TP2_8  5019  [TP380X203]  not placed on the board
RECEIVER2:S2:TP2_9  5019  [TP380X203]  not placed on the board
RECEIVER2:S2:TP2_10  5019  [TP380X203]  not placed on the board
RECEIVER2:S2:TP2_11  5019  [TP380X203]  not placed on the board
RECEIVER2:S2:TP2_12  5019  [TP380X203]  not placed on the board
RECEIVER2:S2:TP2_GND1  5019  [TP380X203]  not placed on the board
RECEIVER2:S2:VR1  10k  [TRIMPOT-SMD-TC33X]  not placed on the board
RECEIVER2:S2:VR2  10k  [TRIMPOT-SMD-TC33X]  not placed on the board
RECEIVER2:S5:C1  100n  [C0603]  not placed on the board
RECEIVER2:S5:C2  100n  [C0603]  not placed on the board
RECEIVER2:S5:C3  100n C0G  [C1206]  not placed on the board
RECEIVER2:S5:C4  100n C0G  [C1206]  not placed on the board
RECEIVER2:S5:C5  3.3u  [C0402]  not placed on the board
RECEIVER2:S5:C6  3.3u  [C0402]  not placed on the board
RECEIVER2:S5:D1  MBR0520L  [SOD3816X128N]  not placed on the board
RECEIVER2:S5:D2  MBR0520L  [SOD3816X128N]  not placed on the board
RECEIVER2:S5:IC1  LT6238HGN#PBF  [SOP64P601X175-16N]  not placed on the board
RECEIVER2:S5:R1  300R  [M0805]  not placed on the board
RECEIVER2:S5:R2  300R  [M0805]  not placed on the board
RECEIVER2:S5:R3  82R  [M0805]  not placed on the board
RECEIVER2:S5:R4  82R  [M0805]  not placed on the board
RECEIVER2:S6:C1  100n  [C0603]  not placed on the board
RECEIVER2:S6:C2  100n  [C0603]  not placed on the board
RECEIVER2:S6:C3  100n C0G  [C1206]  not placed on the board
RECEIVER2:S6:C4  100n C0G  [C1206]  not placed on the board
RECEIVER2:S6:C5  3.3u  [C0402]  not placed on the board
RECEIVER2:S6:C6  3.3u  [C0402]  not placed on the board
RECEIVER2:S6:D1  MBR0520L  [SOD3816X128N]  not placed on the board
RECEIVER2:S6:D2  MBR0520L  [SOD3816X128N]  not placed on the board
RECEIVER2:S6:IC1  LT6238HGN#PBF  [SOP64P601X175-16N]  not placed on the board
RECEIVER2:S6:R1  300R  [M0805]  not placed on the board
RECEIVER2:S6:R2  300R  [M0805]  not placed on the board
RECEIVER2:S6:R3  82R  [M0805]  not placed on the board
RECEIVER2:S6:R4  82R  [M0805]  not placed on the board
RECEIVER2:S7:C1  100n  [C0603]  not placed on the board
RECEIVER2:S7:C2  100n  [C0603]  not placed on the board
RECEIVER2:S7:C3  100n C0G  [C1206]  not placed on the board
RECEIVER2:S7:C4  100n C0G  [C1206]  not placed on the board
RECEIVER2:S7:C5  3.3u  [C0402]  not placed on the board
RECEIVER2:S7:C6  3.3u  [C0402]  not placed on the board
RECEIVER2:S7:D1  MBR0520L  [SOD3816X128N]  not placed on the board
RECEIVER2:S7:D2  MBR0520L  [SOD3816X128N]  not placed on the board
RECEIVER2:S7:IC1  LT6238HGN#PBF  [SOP64P601X175-16N]  not placed on the board
RECEIVER2:S7:R1  300R  [M0805]  not placed on the board
RECEIVER2:S7:R2  300R  [M0805]  not placed on the board
RECEIVER2:S7:R3  82R  [M0805]  not placed on the board
RECEIVER2:S7:R4  82R  [M0805]  not placed on the board
RECEIVER2:S12:C1  100n  [C0603]  not placed on the board
RECEIVER2:S12:C2  100n  [C0603]  not placed on the board
RECEIVER2:S12:C3  100n C0G  [C1206]  not placed on the board
RECEIVER2:S12:C4  100n C0G  [C1206]  not placed on the board
RECEIVER2:S12:C5  3.3u  [C0402]  not placed on the board
RECEIVER2:S12:C6  3.3u  [C0402]  not placed on the board
RECEIVER2:S12:D1  MBR0520L  [SOD3816X128N]  not placed on the board
RECEIVER2:S12:D2  MBR0520L  [SOD3816X128N]  not placed on the board
RECEIVER2:S12:IC1  LT6238HGN#PBF  [SOP64P601X175-16N]  not placed on the board
RECEIVER2:S12:R1  300R  [M0805]  not placed on the board
RECEIVER2:S12:R2  300R  [M0805]  not placed on the board
RECEIVER2:S12:R3  82R  [M0805]  not placed on the board
RECEIVER2:S12:R4  82R  [M0805]  not placed on the board
RECEIVER3:ADC2:ADC1  LTC2344-16  [QFN32]  not placed on the board
RECEIVER3:ADC2:C139  0.1uf  [C0402]  not placed on the board
RECEIVER3:ADC2:C140  47uf 10V  [C1210]  not placed on the board
RECEIVER3:ADC2:C141  2.2uf  [C0402]  not placed on the board
RECEIVER3:ADC2:C142  0.1uf  [C0402]  not placed on the board
RECEIVER3:ADC2:C143  0.1uf  [C0402]  not placed on the board
RECEIVER3:ADC2:R1  33R  [R0402]  not placed on the board
RECEIVER3:ADC2:R2  33R  [R0402]  not placed on the board
RECEIVER3:ADC2:R3  33R  [R0402]  not placed on the board
RECEIVER3:ADC2:R4  33R  [R0402]  not placed on the board
RECEIVER3:ADC2:R5  33R  [R0402]  not placed on the board
RECEIVER3:ADC2:R6  33R  [R0402]  not placed on the board
RECEIVER3:ADC2:R7  33R  [R0402]  not placed on the board
RECEIVER3:S1:C1  0.1uF  [WCAP-CSGP_0402]  not placed on the board
RECEIVER3:S1:C2  0.1uF  [WCAP-CSGP_0402]  not placed on the board
RECEIVER3:S1:C3  0.1uF  [WCAP-CSGP_0402]  not placed on the board
RECEIVER3:S1:C4  0.1uF  [WCAP-CSGP_0402]  not placed on the board
RECEIVER3:S1:C5  0.1uF  [WCAP-CSGP_0402]  not placed on the board
RECEIVER3:S1:C6  0.1uF  [WCAP-CSGP_0402]  not placed on the board
RECEIVER3:S1:C7  0.1uF  [WCAP-CSGP_0402]  not placed on the board
RECEIVER3:S1:C8  0.1uF  [WCAP-CSGP_0402]  not placed on the board
RECEIVER3:S1:C9  0.1uF  [WCAP-CSGP_0402]  not placed on the board
RECEIVER3:S1:C10  0.1uF  [WCAP-CSGP_0402]  not placed on the board
RECEIVER3:S1:C11  18nF  [WCAP-CSGP_0402]  not placed on the board
RECEIVER3:S1:C12  18nF  [WCAP-CSGP_0402]  not placed on the board
RECEIVER3:S1:C13  0.1uF  [WCAP-CSGP_0402]  not placed on the board
RECEIVER3:S1:C14  0.1uF  [WCAP-CSGP_0402]  not placed on the board
RECEIVER3:S1:C15  0.1uF  [WCAP-CSGP_0402]  not placed on the board
RECEIVER3:S1:C16  0.1uF  [WCAP-CSGP_0402]  not placed on the board
RECEIVER3:S1:C17  0.1uF  [WCAP-CSGP_0402]  not placed on the board
RECEIVER3:S1:C18  0.1uF  [WCAP-CSGP_0402]  not placed on the board
RECEIVER3:S1:C19  10nF  [WCAP-CSGP_0402]  not placed on the board
RECEIVER3:S1:C20  10nF  [WCAP-CSGP_0402]  not placed on the board
RECEIVER3:S1:C21  0.1uF  [WCAP-CSGP_0402]  not placed on the board
RECEIVER3:S1:C22  0.1uF  [WCAP-CSGP_0402]  not placed on the board
RECEIVER3:S1:C23  0.1uF  [WCAP-CSGP_0402]  not placed on the board
RECEIVER3:S1:C24  22pF  [WCAP-CSGP_0402]  not placed on the board
RECEIVER3:S1:C26  0.1uF  [WCAP-CSGP_0402]  not placed on the board
RECEIVER3:S1:C27  22pF  [WCAP-CSGP_0402]  not placed on the board
RECEIVER3:S1:C51  0.1uF  [WCAP-CSGP_0402]  not placed on the board
RECEIVER3:S1:C52  0.1uF  [WCAP-CSGP_0402]  not placed on the board
RECEIVER3:S1:C53  0.1uF  [WCAP-CSGP_0402]  not placed on the board
RECEIVER3:S1:C54  0.1uF  [WCAP-CSGP_0402]  not placed on the board
RECEIVER3:S1:C55  0.1uF  [WCAP-CSGP_0402]  not placed on the board
RECEIVER3:S1:C56  0.1uF  [WCAP-CSGP_0402]  not placed on the board
RECEIVER3:S1:D1  BAT64-04E6433  [SOT95P260X110-3N]  not placed on the board
RECEIVER3:S1:D2  BAT64-04E6433  [SOT95P260X110-3N]  not placed on the board
RECEIVER3:S1:IC1  AD8334ACPZ  [QFN50P900X900X100-65N]  not placed on the board
RECEIVER3:S1:L1  BLM21AG121SN1D  [L2012C]  not placed on the board
RECEIVER3:S1:L6  BLM21AG121SN1D  [L2012C]  not placed on the board
RECEIVER3:S1:L27  BLM21AG121SN1D  [L2012C]  not placed on the board
RECEIVER3:S1:L28  BLM21AG121SN1D  [L2012C]  not placed on the board
RECEIVER3:S1:L29  BLM21AG121SN1D  [L2012C]  not placed on the board
RECEIVER3:S1:L30  BLM21AG121SN1D  [L2012C]  not placed on the board
RECEIVER3:S1:L31  BLM21AG121SN1D  [L2012C]  not placed on the board
RECEIVER3:S1:L32  BLM21AG121SN1D  [L2012C]  not placed on the board
RECEIVER3:S1:R1  39K  [R0402']  not placed on the board
RECEIVER3:S1:R2  0R  [R0402']  not placed on the board
RECEIVER3:S1:R3  39K  [R0402']  not placed on the board
RECEIVER3:S1:R4  4K02  [R0402']  not placed on the board
RECEIVER3:S1:R5  4K02  [R0402']  not placed on the board
RECEIVER3:S1:R6  DNP  [R0402']  not placed on the board
RECEIVER3:S1:R7  0R  [R0402']  not placed on the board
RECEIVER3:S1:R8  0R  [R0402']  not placed on the board
RECEIVER3:S1:R9  1K  [R0402']  not placed on the board
RECEIVER3:S1:R10  DNP  [R0402']  not placed on the board
RECEIVER3:S1:R11  0R  [R0402']  not placed on the board
RECEIVER3:S1:R12  274R  [R0402']  not placed on the board
RECEIVER3:S1:R13  1K  [R0402']  not placed on the board
RECEIVER3:S1:R15  274R  [R0402']  not placed on the board
RECEIVER3:S1:TP2_5  5019  [TP380X203]  not placed on the board
RECEIVER3:S1:TP2_6  5019  [TP380X203]  not placed on the board
RECEIVER3:S1:TP2_7  5019  [TP380X203]  not placed on the board
RECEIVER3:S1:TP2_8  5019  [TP380X203]  not placed on the board
RECEIVER3:S1:TP2_9  5019  [TP380X203]  not placed on the board
RECEIVER3:S1:TP2_10  5019  [TP380X203]  not placed on the board
RECEIVER3:S1:TP2_11  5019  [TP380X203]  not placed on the board
RECEIVER3:S1:TP2_12  5019  [TP380X203]  not placed on the board
RECEIVER3:S1:TP2_GND1  5019  [TP380X203]  not placed on the board
RECEIVER3:S1:VR1  10k  [TRIMPOT-SMD-TC33X]  not placed on the board
RECEIVER3:S1:VR2  10k  [TRIMPOT-SMD-TC33X]  not placed on the board
RECEIVER3:S2:C1  0.1uF  [WCAP-CSGP_0402]  not placed on the board
RECEIVER3:S2:C2  0.1uF  [WCAP-CSGP_0402]  not placed on the board
RECEIVER3:S2:C3  0.1uF  [WCAP-CSGP_0402]  not placed on the board
RECEIVER3:S2:C4  0.1uF  [WCAP-CSGP_0402]  not placed on the board
RECEIVER3:S2:C5  0.1uF  [WCAP-CSGP_0402]  not placed on the board
RECEIVER3:S2:C6  0.1uF  [WCAP-CSGP_0402]  not placed on the board
RECEIVER3:S2:C7  0.1uF  [WCAP-CSGP_0402]  not placed on the board
RECEIVER3:S2:C8  0.1uF  [WCAP-CSGP_0402]  not placed on the board
RECEIVER3:S2:C9  0.1uF  [WCAP-CSGP_0402]  not placed on the board
RECEIVER3:S2:C10  0.1uF  [WCAP-CSGP_0402]  not placed on the board